# Altium PCB MezzDongle.PcbDoc
Units mil, origin at the board's own origin, x right, y up, seen from the top; angles counter-clockwise.
Board outline 1715 x 1585 mil, 2 copper layers (Top Layer, Bottom Layer); 119 components, 37 nets, 151 pads, 0 vias.
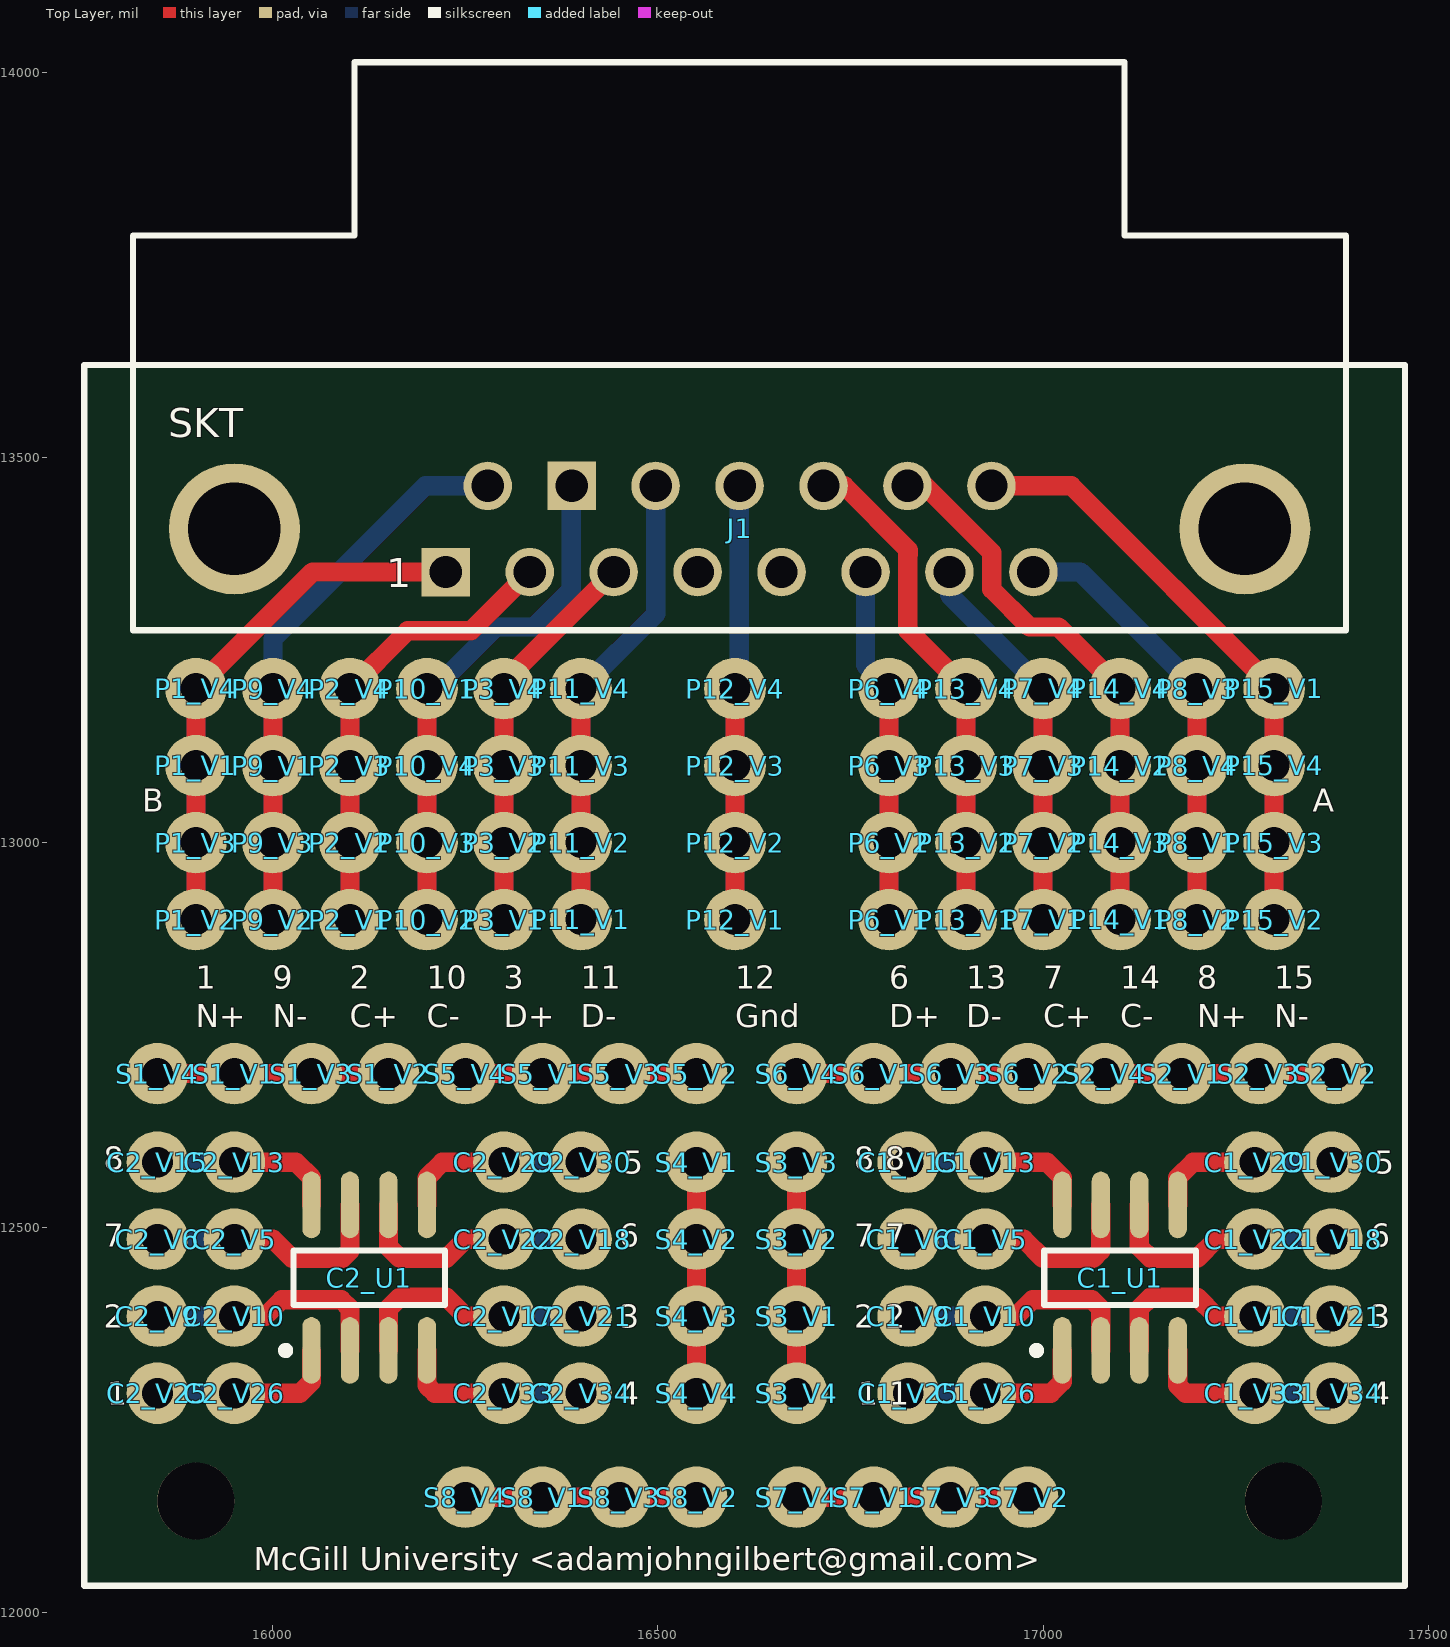
[diagram p0: Top Layer view]
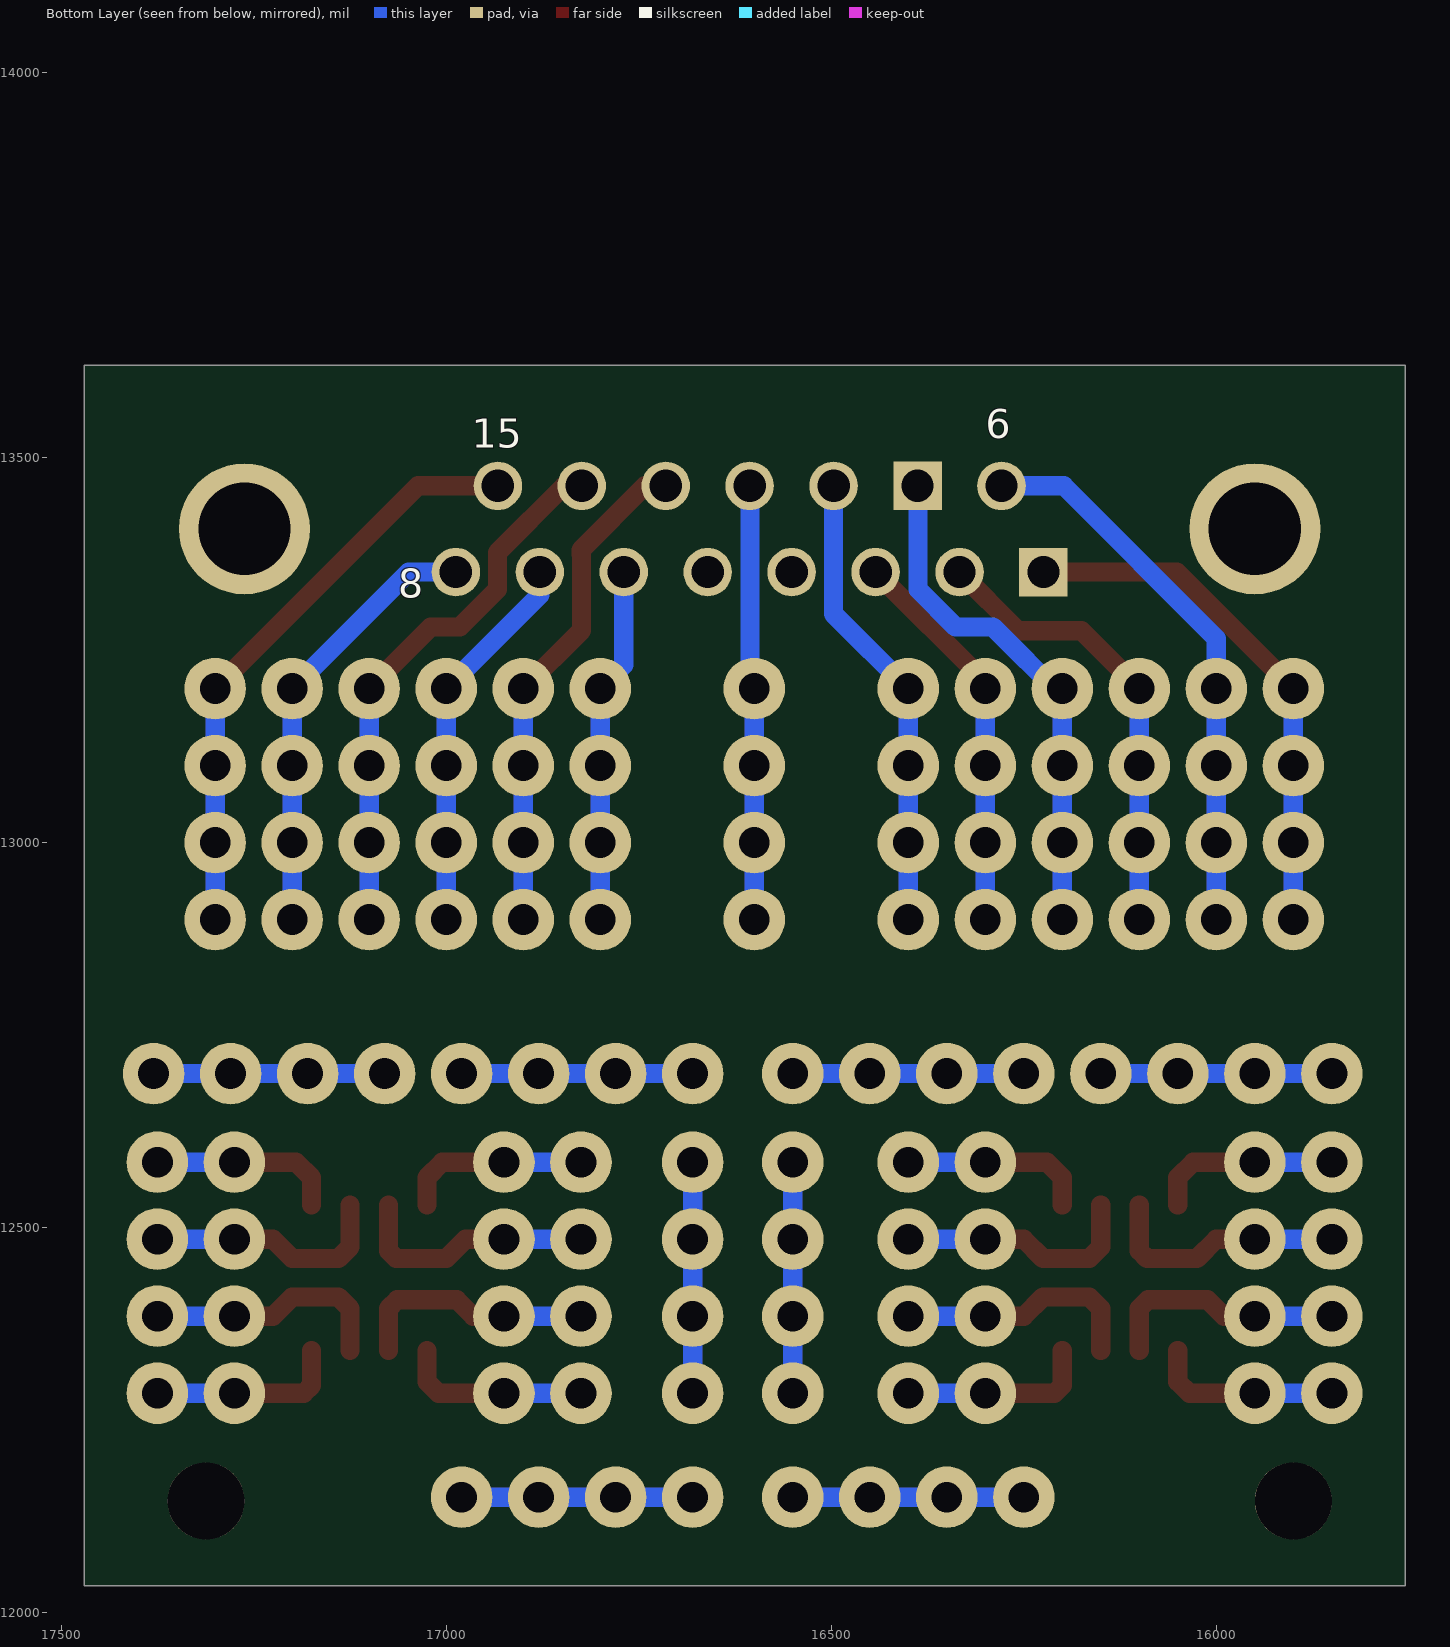
[diagram p1: Bottom Layer view, seen from below]

## Layer stack, top to bottom
Top Layer: signal copper 1.4
Dielectric: dielectric 12.6, FR-4, Dk 4.8
Bottom Layer: signal copper 1.4

## Board outline
15755,13620 17470,13620 17470,12035 15755,12035 15755,13620

## Design rules (kind name [scope] priority, off if disabled: settings)
Clearance [All] p1: gap=10
HoleSize [All] p1: absolutevalues=TRUE maxlimit=150 minlimit=1 maxpercent=80.000 minpercent=20.000
PolygonConnect [All] p1: connectstyle=Relief reliefconductorwidth=10 reliefentries=4 polygonreliefangle="90 Angle"
RoomDefinition S8 [InComponentClass('S8')] p1: confinementstyle=ConfineIn formatcopy=TRUE lockcomponents=FALSE outline 16195,12095 16605,12095 16605,12205 16195,12205
RoomDefinition S7 [InComponentClass('S7')] p2: confinementstyle=ConfineIn formatcopy=TRUE lockcomponents=FALSE outline 16625,12095 17035,12095 17035,12205 16625,12205
RoomDefinition S6 [InComponentClass('S6')] p3: confinementstyle=ConfineIn formatcopy=TRUE lockcomponents=FALSE outline 16625,12645 17035,12645 17035,12755 16625,12755
RoomDefinition S5 [InComponentClass('S5')] p4: confinementstyle=ConfineIn formatcopy=TRUE lockcomponents=FALSE outline 16195,12645 16605,12645 16605,12755 16195,12755
RoomDefinition S4 [InComponentClass('S4')] p5: confinementstyle=ConfineIn formatcopy=TRUE lockcomponents=FALSE outline 16495,12230 16605,12230 16605,12640 16495,12640
RoomDefinition S3 [InComponentClass('S3')] p6: confinementstyle=ConfineIn formatcopy=TRUE lockcomponents=FALSE outline 16625,12230 16735,12230 16735,12640 16625,12640
RoomDefinition P15 [InComponentClass('P15')] p7: confinementstyle=ConfineIn formatcopy=TRUE lockcomponents=FALSE outline 17245,12845 17355,12845 17355,13255 17245,13255
RoomDefinition P14 [InComponentClass('P14')] p8: confinementstyle=ConfineIn formatcopy=TRUE lockcomponents=FALSE outline 17045,12845 17155,12845 17155,13255 17045,13255
RoomDefinition P13 [InComponentClass('P13')] p9: confinementstyle=ConfineIn formatcopy=TRUE lockcomponents=FALSE outline 16845,12845 16955,12845 16955,13255 16845,13255
RoomDefinition P12 [InComponentClass('P12')] p10: confinementstyle=ConfineIn formatcopy=TRUE lockcomponents=FALSE outline 16545,12845 16655,12845 16655,13255 16545,13255
RoomDefinition P11 [InComponentClass('P11')] p11: confinementstyle=ConfineIn formatcopy=TRUE lockcomponents=FALSE outline 16345,12845 16455,12845 16455,13255 16345,13255
RoomDefinition P10 [InComponentClass('P10')] p12: confinementstyle=ConfineIn formatcopy=TRUE lockcomponents=FALSE outline 16145,12845 16255,12845 16255,13255 16145,13255
RoomDefinition P9 [InComponentClass('P9')] p13: confinementstyle=ConfineIn formatcopy=TRUE lockcomponents=FALSE outline 15945,12845 16055,12845 16055,13255 15945,13255
RoomDefinition P8 [InComponentClass('P8')] p14: confinementstyle=ConfineIn formatcopy=TRUE lockcomponents=FALSE outline 17145,12845 17255,12845 17255,13255 17145,13255
RoomDefinition P7 [InComponentClass('P7')] p15: confinementstyle=ConfineIn formatcopy=TRUE lockcomponents=FALSE outline 16945,12845 17055,12845 17055,13255 16945,13255
RoomDefinition P6 [InComponentClass('P6')] p16: confinementstyle=ConfineIn formatcopy=TRUE lockcomponents=FALSE outline 16745,12845 16855,12845 16855,13255 16745,13255
RoomDefinition P3 [InComponentClass('P3')] p17: confinementstyle=ConfineIn formatcopy=TRUE lockcomponents=FALSE outline 16245,12845 16355,12845 16355,13255 16245,13255
RoomDefinition P2 [InComponentClass('P2')] p18: confinementstyle=ConfineIn formatcopy=TRUE lockcomponents=FALSE outline 16045,12845 16155,12845 16155,13255 16045,13255
RoomDefinition P1 [InComponentClass('P1')] p19: confinementstyle=ConfineIn formatcopy=TRUE lockcomponents=FALSE outline 15845,12845 15955,12845 15955,13255 15845,13255
RoomDefinition C2 [InComponentClass('C2')] p20: confinementstyle=ConfineIn formatcopy=TRUE lockcomponents=FALSE outline 15795,12230 16455,12230 16455,12640 15795,12640
RoomDefinition C1 [InComponentClass('C1')] p21: confinementstyle=ConfineIn formatcopy=TRUE lockcomponents=FALSE outline 16770,12230 17430,12230 17430,12640 16770,12640
RoomDefinition S2 [InComponentClass('S2')] p22: confinementstyle=ConfineIn formatcopy=TRUE lockcomponents=FALSE outline 17025,12645 17435,12645 17435,12755 17025,12755
RoomDefinition S1 [InComponentClass('S1')] p23: confinementstyle=ConfineIn formatcopy=TRUE lockcomponents=FALSE outline 15795,12645 16205,12645 16205,12755 15795,12755
RoomDefinition MezzDongle [InComponentClass('MezzDongle')] p24: confinementstyle=ConfineIn formatcopy=TRUE lockcomponents=FALSE outline 15804.47,13261.75 15804.47,14027.25 17407.47,14027.25 17407.47,13261.75
RoutingVias [All] p1: holewidth=40 width=80 viastyle="Through Hole" minholewidth=40 minwidth=80 maxholewidth=40 maxwidth=80
SilkscreenOverComponentPads [All] p1: minsilkscreentomaskgap=10
SolderMaskExpansion [All] p1: expansion=4
Width [All] p1: maxlimit=50 minlimit=10 preferedwidth=25
26 further rules are at their usual default settings.

## Classes and differential pairs
component class MezzDongle: J1
component class P13: P13_V1 P13_V2 P13_V3 P13_V4
component class P12: P12_V1 P12_V2 P12_V3 P12_V4
component class P11: P11_V1 P11_V2 P11_V3 P11_V4
channel class ParallelVias: P8 P9 P10 P11 P12 P13 P14 P15 V9 V10 V11 V12 V13 V14
component class P10: P10_V1 P10_V2 P10_V3 P10_V4
component class P9: P9_V1 P9_V2 P9_V3 P9_V4
component class P8: P8_V1 P8_V2 P8_V3 P8_V4
component class P7: P7_V1 P7_V2 P7_V3 P7_V4
component class P6: P6_V1 P6_V2 P6_V3 P6_V4
component class P3: P3_V1 P3_V2 P3_V3 P3_V4
component class S6: S6_V1 S6_V2 S6_V3 S6_V4
component class S5: S5_V1 S5_V2 S5_V3 S5_V4
component class S4: S4_V1 S4_V2 S4_V3 S4_V4
component class S3: S3_V1 S3_V2 S3_V3 S3_V4
component class C2: C2_U1 C2_V5 C2_V6 C2_V9 C2_V10 C2_V13 C2_V15 C2_V17 C2_V18 C2_V21 C2_V22 C2_V25 C2_V26 C2_V29 C2_V30 C2_V33 C2_V34
component class C1: C1_U1 C1_V5 C1_V6 C1_V9 C1_V10 C1_V13 C1_V15 C1_V17 C1_V18 C1_V21 C1_V22 C1_V25 C1_V26 C1_V29 C1_V30 C1_V33 C1_V34
channel class Soic8Pads: C1 C2
component class P15: P15_V1 P15_V2 P15_V3 P15_V4
component class P14: P14_V1 P14_V2 P14_V3 P14_V4
component class S2: S2_V1 S2_V2 S2_V3 S2_V4
component class S1: S1_V1 S1_V2 S1_V3 S1_V4
component class P2: P2_V1 P2_V2 P2_V3 P2_V4
component class P1: P1_V1 P1_V2 P1_V3 P1_V4
component class S7: S7_V1 S7_V2 S7_V3 S7_V4
component class S8: S8_V1 S8_V2 S8_V3 S8_V4

## Components (designator, comment, footprint, x,y, rotation, side; value= is the part's Value field where it differs from the comment)
C1_U1 "UA741ID" SO8_N 17100,12435 r90 top (schematic designator U1)
C1_V5 "VIA40mil80mil" VIA40mil80mil 16925,12485 r0 top (schematic designator V5)
C1_V6 "VIA40mil80mil" VIA40mil80mil 16825,12485 r0 top (schematic designator V6)
C1_V9 "VIA40mil80mil" VIA40mil80mil 16825,12385 r0 top (schematic designator V9)
C1_V10 "VIA40mil80mil" VIA40mil80mil 16925,12385 r90 top (schematic designator V10)
C1_V13 "VIA40mil80mil" VIA40mil80mil 16925,12585 r90 top (schematic designator V13)
C1_V15 "VIA40mil80mil" VIA40mil80mil 16825,12585 r90 top (schematic designator V15)
C1_V17 "VIA40mil80mil" VIA40mil80mil 17275,12385 r90 top (schematic designator V17)
C1_V18 "VIA40mil80mil" VIA40mil80mil 17375,12485 r90 top (schematic designator V18)
C1_V21 "VIA40mil80mil" VIA40mil80mil 17375,12385 r90 top (schematic designator V21)
C1_V22 "VIA40mil80mil" VIA40mil80mil 17275,12485 r90 top (schematic designator V22)
C1_V25 "VIA40mil80mil" VIA40mil80mil 16825,12285 r90 top (schematic designator V25)
C1_V26 "VIA40mil80mil" VIA40mil80mil 16925,12285 r90 top (schematic designator V26)
C1_V29 "VIA40mil80mil" VIA40mil80mil 17275,12585 r90 top (schematic designator V29)
C1_V30 "VIA40mil80mil" VIA40mil80mil 17375,12585 r90 top (schematic designator V30)
C1_V33 "VIA40mil80mil" VIA40mil80mil 17275,12285 r90 top (schematic designator V33)
C1_V34 "VIA40mil80mil" VIA40mil80mil 17375,12285 r90 top (schematic designator V34)
C2_U1 "UA741ID" SO8_N 16125,12435 r90 top (schematic designator U1)
C2_V5 "VIA40mil80mil" VIA40mil80mil 15950,12485 r0 top (schematic designator V5)
C2_V6 "VIA40mil80mil" VIA40mil80mil 15850,12485 r0 top (schematic designator V6)
C2_V9 "VIA40mil80mil" VIA40mil80mil 15850,12385 r0 top (schematic designator V9)
C2_V10 "VIA40mil80mil" VIA40mil80mil 15950,12385 r90 top (schematic designator V10)
C2_V13 "VIA40mil80mil" VIA40mil80mil 15950,12585 r90 top (schematic designator V13)
C2_V15 "VIA40mil80mil" VIA40mil80mil 15850,12585 r90 top (schematic designator V15)
C2_V17 "VIA40mil80mil" VIA40mil80mil 16300,12385 r90 top (schematic designator V17)
C2_V18 "VIA40mil80mil" VIA40mil80mil 16400,12485 r90 top (schematic designator V18)
C2_V21 "VIA40mil80mil" VIA40mil80mil 16400,12385 r90 top (schematic designator V21)
C2_V22 "VIA40mil80mil" VIA40mil80mil 16300,12485 r90 top (schematic designator V22)
C2_V25 "VIA40mil80mil" VIA40mil80mil 15850,12285 r90 top (schematic designator V25)
C2_V26 "VIA40mil80mil" VIA40mil80mil 15950,12285 r90 top (schematic designator V26)
C2_V29 "VIA40mil80mil" VIA40mil80mil 16300,12585 r90 top (schematic designator V29)
C2_V30 "VIA40mil80mil" VIA40mil80mil 16400,12585 r90 top (schematic designator V30)
C2_V33 "VIA40mil80mil" VIA40mil80mil 16300,12285 r90 top (schematic designator V33)
C2_V34 "VIA40mil80mil" VIA40mil80mil 16400,12285 r90 top (schematic designator V34)
J1 "DB15_FEMALE" DSUB/RS.318/TM/15 16224,13351 r0 top
P1_V1 "Via40mil80mil" VIA40mil80mil 15900,13100 r0 top (schematic designator V1)
P1_V2 "Via40mil80mil" VIA40mil80mil 15900,12900 r0 top (schematic designator V2)
P1_V3 "Via40mil80mil" VIA40mil80mil 15900,13000 r0 top (schematic designator V3)
P1_V4 "Via40mil80mil" VIA40mil80mil 15900,13200 r0 top (schematic designator V4)
P2_V1 "Via40mil80mil" VIA40mil80mil 16100,12900 r0 top (schematic designator V1)
P2_V2 "Via40mil80mil" VIA40mil80mil 16100,13000 r0 top (schematic designator V2)
P2_V3 "Via40mil80mil" VIA40mil80mil 16100,13100 r0 top (schematic designator V3)
P2_V4 "Via40mil80mil" VIA40mil80mil 16100,13200 r0 top (schematic designator V4)
P3_V1 "Via40mil80mil" VIA40mil80mil 16300,12900 r0 top (schematic designator V1)
P3_V2 "Via40mil80mil" VIA40mil80mil 16300,13000 r0 top (schematic designator V2)
P3_V3 "Via40mil80mil" VIA40mil80mil 16300,13100 r0 top (schematic designator V3)
P3_V4 "Via40mil80mil" VIA40mil80mil 16300,13200 r0 top (schematic designator V4)
P6_V1 "Via40mil80mil" VIA40mil80mil 16800,12900 r0 top (schematic designator V1)
P6_V2 "Via40mil80mil" VIA40mil80mil 16800,13000 r0 top (schematic designator V2)
P6_V3 "Via40mil80mil" VIA40mil80mil 16800,13100 r0 top (schematic designator V3)
P6_V4 "Via40mil80mil" VIA40mil80mil 16800,13200 r0 top (schematic designator V4)
P7_V1 "Via40mil80mil" VIA40mil80mil 17000,12900 r0 top (schematic designator V1)
P7_V2 "Via40mil80mil" VIA40mil80mil 17000,13000 r0 top (schematic designator V2)
P7_V3 "Via40mil80mil" VIA40mil80mil 17000,13100 r0 top (schematic designator V3)
P7_V4 "Via40mil80mil" VIA40mil80mil 17000,13200 r0 top (schematic designator V4)
P8_V1 "Via40mil80mil" VIA40mil80mil 17200,13000 r0 top (schematic designator V1)
P8_V2 "Via40mil80mil" VIA40mil80mil 17200,12900 r0 top (schematic designator V2)
P8_V3 "Via40mil80mil" VIA40mil80mil 17200,13200 r0 top (schematic designator V3)
P8_V4 "VIA40mil80mil" VIA40mil80mil 17200,13100 r0 top (schematic designator V4)
P9_V1 "Via40mil80mil" VIA40mil80mil 16000,13100 r0 top (schematic designator V1)
P9_V2 "Via40mil80mil" VIA40mil80mil 16000,12900 r0 top (schematic designator V2)
P9_V3 "Via40mil80mil" VIA40mil80mil 16000,13000 r0 top (schematic designator V3)
P9_V4 "Via40mil80mil" VIA40mil80mil 16000,13200 r0 top (schematic designator V4)
P10_V1 "Via40mil80mil" VIA40mil80mil 16200,13200 r0 top (schematic designator V1)
P10_V2 "Via40mil80mil" VIA40mil80mil 16200,12900 r0 top (schematic designator V2)
P10_V3 "Via40mil80mil" VIA40mil80mil 16200,13000 r0 top (schematic designator V3)
P10_V4 "Via40mil80mil" VIA40mil80mil 16200,13100 r0 top (schematic designator V4)
P11_V1 "Via40mil80mil" VIA40mil80mil 16400,12900 r0 top (schematic designator V1)
P11_V2 "Via40mil80mil" VIA40mil80mil 16400,13000 r0 top (schematic designator V2)
P11_V3 "Via40mil80mil" VIA40mil80mil 16400,13100 r0 top (schematic designator V3)
P11_V4 "Via40mil80mil" VIA40mil80mil 16400,13200 r0 top (schematic designator V4)
P12_V1 "Via40mil80mil" VIA40mil80mil 16600,12900 r0 top (schematic designator V1)
P12_V2 "Via40mil80mil" VIA40mil80mil 16600,13000 r0 top (schematic designator V2)
P12_V3 "Via40mil80mil" VIA40mil80mil 16600,13100 r0 top (schematic designator V3)
P12_V4 "Via40mil80mil" VIA40mil80mil 16600,13200 r0 top (schematic designator V4)
P13_V1 "Via40mil80mil" VIA40mil80mil 16900,12900 r0 top (schematic designator V1)
P13_V2 "Via40mil80mil" VIA40mil80mil 16900,13000 r0 top (schematic designator V2)
P13_V3 "Via40mil80mil" VIA40mil80mil 16900,13100 r0 top (schematic designator V3)
P13_V4 "Via40mil80mil" VIA40mil80mil 16900,13200 r0 top (schematic designator V4)
P14_V1 "Via40mil80mil" VIA40mil80mil 17100,12900 r0 top (schematic designator V1)
P14_V2 "Via40mil80mil" VIA40mil80mil 17100,13100 r0 top (schematic designator V2)
P14_V3 "Via40mil80mil" VIA40mil80mil 17100,13000 r0 top (schematic designator V3)
P14_V4 "Via40mil80mil" VIA40mil80mil 17100,13200 r0 top (schematic designator V4)
P15_V1 "Via40mil80mil" VIA40mil80mil 17300,13200 r0 top (schematic designator V1)
P15_V2 "Via40mil80mil" VIA40mil80mil 17300,12900 r0 top (schematic designator V2)
P15_V3 "Via40mil80mil" VIA40mil80mil 17300,13000 r0 top (schematic designator V3)
P15_V4 "Via40mil80mil" VIA40mil80mil 17300,13100 r0 top (schematic designator V4)
S1_V1 "VIA40mil80mil" VIA40mil80mil 15950,12700 r0 top (schematic designator V1)
S1_V2 "VIA40mil80mil" VIA40mil80mil 16150,12700 r0 top (schematic designator V2)
S1_V3 "VIA40mil80mil" VIA40mil80mil 16050,12700 r0 top (schematic designator V3)
S1_V4 "VIA40mil80mil" VIA40mil80mil 15850,12700 r0 top (schematic designator V4)
S2_V1 "VIA40mil80mil" VIA40mil80mil 17180,12700 r0 top (schematic designator V1)
S2_V2 "VIA40mil80mil" VIA40mil80mil 17380,12700 r0 top (schematic designator V2)
S2_V3 "VIA40mil80mil" VIA40mil80mil 17280,12700 r0 top (schematic designator V3)
S2_V4 "VIA40mil80mil" VIA40mil80mil 17080,12700 r0 top (schematic designator V4)
S3_V1 "VIA40mil80mil" VIA40mil80mil 16680,12385 r90 top (schematic designator V1)
S3_V2 "VIA40mil80mil" VIA40mil80mil 16680,12485 r90 top (schematic designator V2)
S3_V3 "VIA40mil80mil" VIA40mil80mil 16680,12585 r90 top (schematic designator V3)
S3_V4 "VIA40mil80mil" VIA40mil80mil 16680,12285 r90 top (schematic designator V4)
S4_V1 "VIA40mil80mil" VIA40mil80mil 16550,12585 r90 top (schematic designator V1)
S4_V2 "VIA40mil80mil" VIA40mil80mil 16550,12485 r90 top (schematic designator V2)
S4_V3 "VIA40mil80mil" VIA40mil80mil 16550,12385 r90 top (schematic designator V3)
S4_V4 "VIA40mil80mil" VIA40mil80mil 16550,12285 r90 top (schematic designator V4)
S5_V1 "VIA40mil80mil" VIA40mil80mil 16350,12700 r0 top (schematic designator V1)
S5_V2 "VIA40mil80mil" VIA40mil80mil 16550,12700 r0 top (schematic designator V2)
S5_V3 "VIA40mil80mil" VIA40mil80mil 16450,12700 r0 top (schematic designator V3)
S5_V4 "VIA40mil80mil" VIA40mil80mil 16250,12700 r0 top (schematic designator V4)
S6_V1 "VIA40mil80mil" VIA40mil80mil 16780,12700 r0 top (schematic designator V1)
S6_V2 "VIA40mil80mil" VIA40mil80mil 16980,12700 r0 top (schematic designator V2)
S6_V3 "VIA40mil80mil" VIA40mil80mil 16880,12700 r0 top (schematic designator V3)
S6_V4 "VIA40mil80mil" VIA40mil80mil 16680,12700 r0 top (schematic designator V4)
S7_V1 "VIA40mil80mil" VIA40mil80mil 16780,12150 r0 top (schematic designator V1)
S7_V2 "VIA40mil80mil" VIA40mil80mil 16980,12150 r0 top (schematic designator V2)
S7_V3 "VIA40mil80mil" VIA40mil80mil 16880,12150 r0 top (schematic designator V3)
S7_V4 "VIA40mil80mil" VIA40mil80mil 16680,12150 r0 top (schematic designator V4)
S8_V1 "VIA40mil80mil" VIA40mil80mil 16350,12150 r0 top (schematic designator V1)
S8_V2 "VIA40mil80mil" VIA40mil80mil 16550,12150 r0 top (schematic designator V2)
S8_V3 "VIA40mil80mil" VIA40mil80mil 16450,12150 r0 top (schematic designator V3)
S8_V4 "VIA40mil80mil" VIA40mil80mil 16250,12150 r0 top (schematic designator V4)

## Footprints (in the part's own frame and the unit in brackets; to place one, negate y for a bottom-side part, rotate by r counter-clockwise, add the part's x,y. Pads: shape width x height; smd on the part's side, far side on the other; paste and mask are expansions set on the pad)
DSUB/RS.318/TM/15 [mil]
  rect 63x63 hole 42: 1(0.47,0.25) 10(163.97,112.25)
  round 63 hole 42: 2(109.47,0.25) 3(218.47,0.25) 4(327.47,0.25) 5(436.47,0.25) 6(545.47,0.25) 7(654.47,0.25) 8(763.47,0.25) 9(54.97,112.25) 11(272.97,112.25) 12(381.97,112.25) 13(490.97,112.25) 14(599.97,112.25) 15(708.97,112.25)
  round 170 hole 120: Hole29(1037.97,56.25) Hole30(-274.03,56.25)
  silkscreen extent -406,-75 1169,662
SO8_N [mm] "SOIC, 8-Leads, Body 4.9x3.9mm, Pitch 1.27mm, IPC Medium Density"
  oval 2.2x0.6 smd: 1(-2.4,1.905) 2(-2.4,0.635) 3(-2.4,-0.635) 4(-2.4,-1.905) 5(2.4,-1.905) 6(2.4,-0.635) 7(2.4,0.635) 8(2.4,1.905)
  silkscreen extent -2.52,-2.5 0.9,2.88, body extent -1.95,-2.45 1.95,2.45, height 1.75
VIA40mil80mil [mil] "Via with 40mil hole and 80mil diameter"
  round 80 hole 40: 1(0,0)

## Part data
C1_U1 C2_U1: "General-Purpose Single Operational Amplifier"
P1_V1 P1_V2 P1_V3 P1_V4 P2_V1 P2_V2 P2_V3 P2_V4 P3_V1 P3_V2 P3_V3 P3_V4 P6_V1 P6_V2 P6_V3 P6_V4 P7_V1 P7_V2 P7_V3 P7_V4 P8_V1 P8_V2 P8_V3 P9_V1 P9_V2 P9_V3 P9_V4 P10_V1 P10_V2 P10_V3 P10_V4 P11_V1 P11_V2 P11_V3 P11_V4 P12_V1 P12_V2 P12_V3 P12_V4 P13_V1 P13_V2 P13_V3 P13_V4 P14_V1 P14_V2 P14_V3 P14_V4 P15_V1 P15_V2 P15_V3 P15_V4: library part VIA40mil80mil

## Free pads (board coordinates)
  round 100 hole 100: 0(15899.97,12145) 0(17311.97,12145)

## Nets (pads, with @x,y where several pads share a name; then routed paths per layer and width w, separated by ;. In a path a pad name is that pad's centre, name@x,y a point inside that pad or via, vN(x,y) a via of type N, cw(c..) or ccw(c..) an arc to the next point about the centre after c; other vN are vias at no path point)
NetC1_U1_1: C1_U1.1 C1_V25.1 C1_V26.1 | length 246.7
  Top Layer w25: C1_V26.1 17010,12285 17025,12300 C1_U1.1
  Bottom Layer w25: C1_V25.1 C1_V26.1
NetC1_U1_2: C1_U1.2 C1_V9.1 C1_V10.1 | length 318
  Top Layer w25: C1_V10.1 16965,12385 16986.32,12406.32 17063.68,12406.32 17075,12395 C1_U1.2
  Bottom Layer w25: C1_V9.1 C1_V10.1
NetC1_U1_3: C1_U1.3 C1_V17.1 C1_V21.1 | length 321.1
  Top Layer w25: C1_U1.3 17125,12395 17140,12410 17200,12410 17225,12385 C1_V17.1
  Bottom Layer w25: C1_V17.1 C1_V21.1
NetC1_U1_4: C1_U1.4 C1_V33.1 C1_V34.1 | length 249.7
  Top Layer w25: C1_U1.4 17175,12295 17185,12285 C1_V33.1
  Bottom Layer w25: C1_V33.1 C1_V34.1
NetC1_U1_5: C1_U1.5 C1_V29.1 C1_V30.1 | length 243.8
  Top Layer w25: C1_U1.5 17175,12565 17195,12585 C1_V29.1
  Bottom Layer w25: C1_V29.1 C1_V30.1
NetC1_U1_6: C1_U1.6 C1_V18.1 C1_V22.1 | length 321.1
  Top Layer w25: C1_U1.6 17125,12475 17140,12460 17200,12460 17225,12485 C1_V22.1
  Bottom Layer w25: C1_V22.1 C1_V18.1
NetC1_U1_7: C1_U1.7 C1_V5.1 C1_V6.1 | length 324
  Top Layer w25: C1_V5.1 16975,12485 17000,12460 17065,12460 17075,12470 C1_U1.7
  Bottom Layer w25: C1_V6.1 C1_V5.1
NetC1_U1_8: C1_U1.8 C1_V13.1 C1_V15.1 | length 243.8
  Top Layer w25: C1_V13.1 17005,12585 17025,12565 C1_U1.8
  Bottom Layer w25: C1_V15.1 C1_V13.1
NetC2_U1_1: C2_U1.1 C2_V25.1 C2_V26.1 | length 246.7
  Top Layer w25: C2_V26.1 16035,12285 16050,12300 C2_U1.1
  Bottom Layer w25: C2_V25.1 C2_V26.1
NetC2_U1_2: C2_U1.2 C2_V9.1 C2_V10.1 | length 318
  Top Layer w25: C2_V10.1 15990,12385 16011.32,12406.32 16088.68,12406.32 16100,12395 C2_U1.2
  Bottom Layer w25: C2_V9.1 C2_V10.1
NetC2_U1_3: C2_U1.3 C2_V17.1 C2_V21.1 | length 321.1
  Top Layer w25: C2_U1.3 16150,12395 16165,12410 16225,12410 16250,12385 C2_V17.1
  Bottom Layer w25: C2_V17.1 C2_V21.1
NetC2_U1_4: C2_U1.4 C2_V33.1 C2_V34.1 | length 249.7
  Top Layer w25: C2_U1.4 16200,12295 16210,12285 C2_V33.1
  Bottom Layer w25: C2_V33.1 C2_V34.1
NetC2_U1_5: C2_U1.5 C2_V29.1 C2_V30.1 | length 243.8
  Top Layer w25: C2_U1.5 16200,12565 16220,12585 C2_V29.1
  Bottom Layer w25: C2_V29.1 C2_V30.1
NetC2_U1_6: C2_U1.6 C2_V18.1 C2_V22.1 | length 321.1
  Top Layer w25: C2_U1.6 16150,12475 16165,12460 16225,12460 16250,12485 C2_V22.1
  Bottom Layer w25: C2_V22.1 C2_V18.1
NetC2_U1_7: C2_U1.7 C2_V5.1 C2_V6.1 | length 324
  Top Layer w25: C2_V5.1 16000,12485 16025,12460 16090,12460 16100,12470 C2_U1.7
  Bottom Layer w25: C2_V6.1 C2_V5.1
NetC2_U1_8: C2_U1.8 C2_V13.1 C2_V15.1 | length 243.8
  Top Layer w25: C2_V13.1 16030,12585 16050,12565 C2_U1.8
  Bottom Layer w25: C2_V15.1 C2_V13.1
NetJ1_1: J1.1 P1_V1.1 P1_V2.1 P1_V3.1 P1_V4.1 | length 1387.1
  Top Layer w25: P1_V2.1 P1_V3.1 P1_V1.1 P1_V4.1 16051.25,13351.25 J1.1
  Bottom Layer w25: P1_V3.1 P1_V2.1 P1_V4.1 P1_V1.1 ; P1_V3.1 P1_V1.1 ; P1_V3.1 P1_V1.1
NetJ1_2: J1.2 P2_V1.1 P2_V2.1 P2_V3.1 P2_V4.1 | length 913.9
  Top Layer w25: P2_V1.1 P2_V2.1 P2_V3.1 P2_V4.1 16175,13275 16257.22,13275 J1.2
  Bottom Layer w25: P2_V1.1 P2_V2.1 P2_V3.1 P2_V4.1 ; J1.2@16333.47,13333.47 J1.2
NetJ1_3: J1.3 P3_V1.1 P3_V2.1 P3_V3.1 P3_V4.1 | length 839
  Top Layer w25: P3_V1.1 P3_V2.1 P3_V3.1 P3_V4.1 16300,13208.78 J1.3
  Bottom Layer w25: P3_V1.1 P3_V2.1 P3_V3.1 P3_V4.1 P3_V4.1@16310,13200 ; J1.3@16442.47,13332.47 J1.3
NetJ1_6: J1.6 P6_V1.1 P6_V2.1 P6_V3.1 P6_V4.1 | length 778
  Top Layer w25: P6_V1.1 P6_V2.1 P6_V3.1 P6_V4.1
  Bottom Layer w25: J1.6 16769.47,13230.53 P6_V4.1 ; P6_V4.1@16790,13210 P6_V4.1 ; P6_V1.1 P6_V2.1 P6_V3.1 P6_V4.1
NetJ1_7: J1.7 P7_V1.1 P7_V2.1 P7_V3.1 P7_V4.1 | length 801.6
  Top Layer w25: P7_V1.1 P7_V2.1 P7_V3.1 P7_V4.1
  Bottom Layer w25: J1.7 16878.47,13321.53 P7_V4.1 P7_V3.1 P7_V2.1 P7_V1.1
NetJ1_8: J1.8 P8_V1.1 P8_V2.1 P8_V3.1 P8_V4.1 | length 875.2
  Top Layer w25: P8_V2.1 P8_V1.1 P8_V4.1 P8_V3.1
  Bottom Layer w25: J1.8 17048.75,13351.25 P8_V3.1 P8_V4.1 P8_V1.1 P8_V2.1
NetJ1_9: J1.9 P9_V1.1 P9_V2.1 P9_V3.1 P9_V4.1 | length 1033.2
  Top Layer w25: P9_V2.1 P9_V3.1 P9_V1.1 P9_V4.1 P9_V4.1@16005,13205
  Bottom Layer w25: P9_V2.1 P9_V3.1 P9_V1.1 P9_V4.1 16000,13265 16198.25,13463.25 J1.9
NetJ1_10: J1.10 P10_V1.1 P10_V2.1 P10_V3.1 P10_V4.1 | length 970.3
  Top Layer w25: P10_V2.1 P10_V3.1 P10_V4.1 P10_V1.1 ; J1.10@16387.47,13462.75 J1.10
  Bottom Layer w25: P10_V2.1 P10_V3.1 P10_V4.1 16200,13190 16290,13280 16338.58,13280 16387.47,13328.88 16387.47,13462.75 J1.10
NetJ1_11: J1.11 P11_V1.1 P11_V2.1 P11_V3.1 P11_V4.1 | length 903.4
  Top Layer w25: P11_V1.1 P11_V2.1 P11_V3.1 P11_V4.1
  Bottom Layer w25: P11_V1.1 P11_V2.1 P11_V3.1 P11_V4.1 16496.97,13296.97 J1.11
NetJ1_12: J1.12 P12_V1.1 P12_V2.1 P12_V3.1 P12_V4.1 | length 865.7
  Top Layer w25: P12_V1.1 P12_V2.1 P12_V3.1 P12_V4.1
  Bottom Layer w25: P12_V1.1 P12_V2.1 P12_V3.1 P12_V4.1 16605.47,13205.47 16605.47,13462.75 J1.12
NetJ1_13: J1.13 P13_V1.1 P13_V2.1 P13_V3.1 P13_V4.1 | length 956.7
  Top Layer w25: J1.13@16715.47,13462.75 J1.13 16741.75,13463.25 16825,13380 16825,13374.15 16824.47,13373.62 16824.47,13275.53 P13_V4.1 P13_V3.1 P13_V2.1 P13_V1.1
  Bottom Layer w25: P13_V1.1 P13_V2.1 P13_V3.1 P13_V4.1
NetJ1_14: J1.14 P14_V1.1 P14_V2.1 P14_V3.1 P14_V4.1 | length 1030.8
  Top Layer w25: J1.14 16846.75,13463.25 16933.47,13376.53 16933.47,13328.88 16982.35,13280 17020,13280 P14_V4.1 P14_V2.1 P14_V3.1 P14_V1.1
  Bottom Layer w25: J1.14 J1.14@16841.75,13463.25 ; P14_V1.1 P14_V3.1 P14_V2.1 P14_V4.1
NetJ1_15: J1.15 P15_V1.1 P15_V2.1 P15_V3.1 P15_V4.1 | length 1076.1
  Top Layer w25: J1.15 17036.75,13463.25 P15_V1.1 P15_V4.1 P15_V3.1 P15_V2.1
  Bottom Layer w25: P15_V2.1 P15_V3.1 P15_V4.1 P15_V1.1
SHORT1: S1_V1.1 S1_V2.1 S1_V3.1 S1_V4.1 | length 600
  Top Layer w25: S1_V4.1 S1_V1.1 S1_V3.1 S1_V2.1
  Bottom Layer w25: S1_V4.1 S1_V1.1 S1_V3.1 S1_V2.1
SHORT2: S2_V1.1 S2_V2.1 S2_V3.1 S2_V4.1 | length 600
  Top Layer w25: S2_V4.1 S2_V1.1 S2_V3.1 S2_V2.1
  Bottom Layer w25: S2_V4.1 S2_V1.1 S2_V3.1 S2_V2.1
SHORT3: S3_V1.1 S3_V2.1 S3_V3.1 S3_V4.1 | length 600
  Top Layer w25: S3_V4.1 S3_V1.1 S3_V2.1 S3_V3.1
  Bottom Layer w25: S3_V4.1 S3_V1.1 S3_V2.1 S3_V3.1
SHORT4: S4_V1.1 S4_V2.1 S4_V3.1 S4_V4.1 | length 600
  Top Layer w25: S4_V4.1 S4_V3.1 S4_V2.1 S4_V1.1
  Bottom Layer w25: S4_V4.1 S4_V3.1 S4_V2.1 S4_V1.1
SHORT5: S5_V1.1 S5_V2.1 S5_V3.1 S5_V4.1 | length 600
  Top Layer w25: S5_V4.1 S5_V1.1 S5_V3.1 S5_V2.1
  Bottom Layer w25: S5_V4.1 S5_V1.1 S5_V3.1 S5_V2.1
SHORT6: S6_V1.1 S6_V2.1 S6_V3.1 S6_V4.1 | length 600
  Top Layer w25: S6_V4.1 S6_V1.1 S6_V3.1 S6_V2.1
  Bottom Layer w25: S6_V4.1 S6_V1.1 S6_V3.1 S6_V2.1
SHORT7: S7_V1.1 S7_V2.1 S7_V3.1 S7_V4.1 | length 600
  Top Layer w25: S7_V4.1 S7_V1.1 S7_V3.1 S7_V2.1
  Bottom Layer w25: S7_V4.1 S7_V1.1 S7_V3.1 S7_V2.1
SHORT8: S8_V1.1 S8_V2.1 S8_V3.1 S8_V4.1 | length 600
  Top Layer w25: S8_V4.1 S8_V1.1 S8_V3.1 S8_V2.1
  Bottom Layer w25: S8_V4.1 S8_V1.1 S8_V3.1 S8_V2.1
pads on no net: J1.4 J1.5 J1.Hole29 J1.Hole30

## Polygon pours and split planes (outlines as drawn)
no net on Top Overlay "TopOverlay-No Net" (none): 15755,13620 17470,13620 17470,12035 15755,12035 15755,13620

## Silkscreen, mask and mechanical layers (free items; w line width, h text height)
Top Overlay:
  text "B" at 15830,13040 h30
  text "A" at 17350,13040 h30
  text "1" at 15900,12810 h30
  text "9" at 16000,12810 h30
  text "2" at 16100,12810 h30
  text "10" at 16200,12810 h30
  text "3" at 16300,12810 h30
  text "11" at 16400,12810 h30
  text "12" at 16600,12810 h30
  text "6" at 16800,12810 h30
  text "13" at 16900,12810 h30
  text "7" at 17000,12810 h30
  text "14" at 17100,12810 h30
  text "8" at 17200,12810 h30
  text "15" at 17300,12810 h30
  text "N+" at 15900,12760 h30
  text "N-" at 16000,12760 h30
  text "C+" at 16100,12760 h30
  text "C-" at 16200,12760 h30
  text "D+" at 16300,12760 h30
  text "D-" at 16400,12760 h30
  text "Gnd" at 16600,12760 h30
  text "D+" at 16800,12760 h30
  text "D-" at 16900,12760 h30
  text "C+" at 17000,12760 h30
  text "C-" at 17100,12760 h30
  text "N+" at 17200,12760 h30
  text "N-" at 17300,12760 h30
  text "8" at 15780,12575 h30
  text "8" at 16755,12575 h30
  text "8" at 16795,12575 h30
  text "5" at 16455,12570 h30
  text "5" at 17430,12570 h30
  text "7" at 15780,12475 h30
  text "6" at 16450,12475 h30
  text "7" at 16755,12475 h30
  text "7" at 16795,12475 h30
  text "6" at 17425,12475 h30
  text "2" at 15780,12370 h30
  text "3" at 16450,12370 h30
  text "2" at 16755,12370 h30
  text "2" at 16795,12370 h30
  text "3" at 17425,12370 h30
  text "1" at 15785,12270 h30
  text "4" at 16450,12270 h30
  text "1" at 16760,12270 h30
  text "1" at 16800,12270 h30
  text "4" at 17425,12270 h30
  text "McGill University <adamjohngilbert@gmail.com>" at 15975,12055 h30

## Text inside footprints (layer, text, board x,y; h text height)
J1: Top Overlay "1" at 16146.97,13331.25 h37.5; Top Overlay "SKT" at 15863.8,13526.13 h37.5; Bottom Overlay "15" at 16967,13513 h37.5; Bottom Overlay "8" at 17062.08,13317.62 h37.5; Bottom Overlay "9" at 16267.08,13562.63 h37.5 r180